# EAGLE board CT_schematic (EAGLE 7.6.0)

Size 100 x 80 mm. Coordinates in mm from the lower left corner, seen from the top.
Outline: 0,0 100,0 100,80 0,80 0,0
Copper layers (1*16): Top 0.035mm / dielectric 1.5mm / Bottom 0.035mm
Design rules "default": minimum track width 10mil, minimum drill 24mil, track to track 8mil, track to pad 8mil, pad to pad 8mil, via to via 8mil, smd to smd 8mil, copper to edge 40mil, drill to drill 8mil, minimum pad ring 10mil, minimum via ring 8mil, stop-mask expansion 4mil, vias tented up to drill 0mil, thermal gap 10mil

## Footprints (pad centres in the part's own frame; a part is rotated, then mirrored left to right if it is on the bottom)
C0603 = smd 0.8 x 0.8: 1 -0.762,0; 2 0.762,0
C0402 = smd 0.5 x 0.5: 1 -0.508,0; 2 0.508,0
C0805 = smd 1.2 x 1.3: 1 -1.016,0; 2 1.016,0
C1210 = smd 1.2 x 2.5: 1 -1.524,0; 2 1.524,0
EXV-9H = smd 3.505 x 1.676: 1 -2.857,0; 2 2.857,0
PJ-037B_PACKAGE = drill 3.7 square: 1 12,0 | drill 3.2 square: 2 6,0
R0603 = smd 0.8 x 0.8: 1 -0.762,0; 2 0.762,0
UFBGA100 = smd 0.28 x 0.28: A1 -2.75,2.75; A2 -2.25,2.75; A3 -1.75,2.75; A4 -1.25,2.75; A5 -0.75,2.75; A6 -0.25,2.75; A7 0.25,2.75; A8 0.75,2.75; A9 1.25,2.75; A10 1.75,2.75; A11 2.25,2.75; A12 2.75,2.75; B1 -2.75,2.25; B2 -2.25,2.25; B3 -1.75,2.25; B4 -1.25,2.25; B5 -0.75,2.25; B6 -0.25,2.25; B7 0.25,2.25; B8 0.75,2.25; B9 1.25,2.25; B10 1.75,2.25; B11 2.25,2.25; B12 2.75,2.25; C1 -2.75,1.75; C2 -2.25,1.75; C3 -1.75,1.75; C4 -1.25,1.75; C5 -0.75,1.75; C8 0.75,1.75; C9 1.25,1.75; C10 1.75,1.75; C11 2.25,1.75; C12 2.75,1.75; D1 -2.75,1.25; D2 -2.25,1.25; D3 -1.75,1.25; D10 1.75,1.25; D11 2.25,1.25; D12 2.75,1.25; E1 -2.75,0.75; E2 -2.25,0.75; E3 -1.75,0.75; E10 1.75,0.75; E11 2.25,0.75; E12 2.75,0.75; F1 -2.75,0.25; F2 -2.25,0.25; F11 2.25,0.25; F12 2.75,0.25; G1 -2.75,-0.25; G2 -2.25,-0.25; G11 2.25,-0.25; G12 2.75,-0.25; H1 -2.75,-0.75; H2 -2.25,-0.75; H3 -1.75,-0.75; H10 1.75,-0.75; H11 2.25,-0.75; H12 2.75,-0.75; J1 -2.75,-1.25; J2 -2.25,-1.25; J3 -1.75,-1.25; J10 1.75,-1.25; J11 2.25,-1.25; J12 2.75,-1.25; K1 -2.75,-1.75; K2 -2.25,-1.75; K3 -1.75,-1.75; K4 -1.25,-1.75; K5 -0.75,-1.75; K8 0.75,-1.75; K9 1.25,-1.75; K10 1.75,-1.75; K11 2.25,-1.75; K12 2.75,-1.75; L1 -2.75,-2.25; L2 -2.25,-2.25; L3 -1.75,-2.25; L4 -1.25,-2.25; L5 -0.75,-2.25; L6 -0.25,-2.25; L7 0.25,-2.25; L8 0.75,-2.25; L9 1.25,-2.25; L10 1.75,-2.25; L11 2.25,-2.25; L12 2.75,-2.25; M1 -2.75,-2.75; M2 -2.25,-2.75; M3 -1.75,-2.75; M4 -1.25,-2.75; M5 -0.75,-2.75; M6 -0.25,-2.75; M7 0.25,-2.75; M8 0.75,-2.75; M9 1.25,-2.75; M10 1.75,-2.75; M11 2.25,-2.75; M12 2.75,-2.75
SOIC-8 = smd 1.6 x 0.6: 1 -2.7,1.905 | smd 1.55 x 0.6: 2 -2.7,0.635; 3 -2.7,-0.635; 4 -2.7,-1.905; 5 2.7,-1.905; 6 2.7,-0.635; 7 2.7,0.635; 8 2.7,1.905
SSOP-28 = smd 1.5 x 0.4: 1 -3.625,4.225; 2 -3.625,3.575; 3 -3.625,2.925; 4 -3.625,2.275; 5 -3.625,1.625; 6 -3.625,0.975; 7 -3.625,0.325; 8 -3.625,-0.325; 9 -3.625,-0.975; 10 -3.625,-1.625; 11 -3.625,-2.275; 12 -3.625,-2.925; 13 -3.625,-3.575; 14 -3.625,-4.225; 15 3.625,-4.225; 16 3.625,-3.575; 17 3.625,-2.925; 18 3.625,-2.275; 19 3.625,-1.625; 20 3.625,-0.975; 21 3.625,-0.325; 22 3.625,0.325; 23 3.625,0.975; 24 3.625,1.625; 25 3.625,2.275; 26 3.625,2.925; 27 3.625,3.575; 28 3.625,4.225
FCI_10118193-0001LF = smd 0.4 x 1.35: 1 -1.3,2.675; 2 -0.65,2.675; 3 0,2.675; 4 0.65,2.675; 5 1.3,2.675 | smd 1.6 x 1.4: 6 -3.2,2.45; 7 3.2,2.45 | smd 1.9 x 1.9: 8 -1.2,0; 9 1.2,0 | hole 0.5: -3.3,0; 3.3,0
SAMTEC_FTSH-105-01-L-DV-K = smd 0.762 x 2.794: 1 -2.54,-2.032; 2 -2.54,2.032; 3 -1.27,-2.032; 4 -1.27,2.032; 5 0,-2.032; 6 0,2.032; 7 1.27,-2.032; 8 1.27,2.032; 9 2.54,-2.032; 10 2.54,2.032
XCVR_SPBTLE-RF = smd 1.6 x 1: 1 -6.75,0.33; 2 -6.75,-0.94; 3 -6.75,-2.21; 4 -6.75,-3.48; 5 -6.75,-4.75; 7 6.75,-4.75; 8 6.75,-3.48; 9 6.75,-2.21; 10 6.75,-0.94; 11 6.75,0.33 | smd 1 x 1.6: 6 -2.75,-5.75
ABLS-12.000MHZ-B4-T = smd 5.6 x 2.8: 1 0,0; 2 9.5,0
ASEK = smd 1.4 x 1: 1 -1.1,-0.8; 2 1.1,-0.8; 3 1.1,0.8; 4 -1.1,0.8
ASFL1 = smd 1.7 x 1.5: 1 -1.27,-1.1; 2 1.27,-1.1; 3 1.27,1.1; 4 -1.27,1.1
WSON-8 = smd 0.3 x 0.6: 1 -0.75,0; 2 0.05,0; 3 0.85,0; 4 1.65,0; 5 1.65,3.8; 6 0.85,3.8; 7 0.05,3.8; 8 -0.75,3.8 | smd 3 x 2.6: PAD 0.45,1.9
SON-6 = smd 0.55 x 0.3: 1 -0.355,0.5 | smd 0.52 x 0.3: 2 -0.37,0; 3 -0.37,-0.5; 4 0.37,-0.5; 5 0.37,0; 6 0.37,0.5
SW_4-1437565-2 = smd 1.4 x 2.1: 1 -2.23,4.55; 2 -2.23,-4.55; 3 2.23,4.55; 4 2.23,-4.55
LGM67K-G1J2-24-Z = smd 0.8 x 1.4: A -2,0; C 0,0
NC7SZ125M5X = smd 1.3 x 0.7: 1 -1.3,0.95; 2 -1.3,0; 3 -1.3,-0.95; 4 1.3,-0.95; 5 1.3,0.95

## Placement (x,y rotation side)
C1  1e-07  [C0603]  -43.18,77.47 0 top  (outside the outline)
C2  1e-07  [C0603]  -46.99,77.47 0 top  (outside the outline)
C3  1e-07  [C0603]  -50.8,77.47 0 top  (outside the outline)
C4  1e-07  [C0603]  -54.61,77.47 0 top  (outside the outline)
C5  1e-07  [C0603]  -58.42,77.47 0 top  (outside the outline)
C6  4.7e-06  [C0603]  -39.37,77.47 0 top  (outside the outline)
C7  1e-07  [C0603]  -62.23,77.47 0 top  (outside the outline)
C8  1e-08  [C0603]  -66.04,77.47 0 top  (outside the outline)
C9  1e-06  [C0603]  -69.85,77.47 0 top  (outside the outline)
C10  1e-08  [C0402]  -45.72,82.55 0 top  (outside the outline)
C11  1e-07  [C0402]  -49.53,82.55 0 top  (outside the outline)
C12  4.7e-06  [C0805]  -59.69,64.77 0 top  (outside the outline)
C13  1e-07  [C0402]  -53.34,82.55 0 top  (outside the outline)
C14  1e-07  [C0402]  -57.15,82.55 0 top  (outside the outline)
C15  1e-07  [C0402]  -60.96,82.55 0 top  (outside the outline)
C16  4.7e-06  [C0805]  -64.77,64.77 0 top  (outside the outline)
C17  1e-07  [C0402]  -64.77,82.55 0 top  (outside the outline)
C18  1e-07  [C0402]  -68.58,82.55 0 top  (outside the outline)
C19  1e-07  [C0402]  -72.39,82.55 0 top  (outside the outline)
C20  1e-06  [C0603]  -73.66,77.47 0 top  (outside the outline)
C21  1e-07  [C0402]  -76.2,82.55 0 top  (outside the outline)
C22  1e-08  [C0402]  -15.24,87.63 0 top  (outside the outline)
C23  1e-08  [C0402]  -19.05,87.63 0 top  (outside the outline)
C24  1e-08  [C0402]  -22.86,87.63 0 top  (outside the outline)
C25  1e-08  [C0402]  -26.67,87.63 0 top  (outside the outline)
C26  1e-05  [C1210]  -29.21,66.04 0 top  (outside the outline)
C27  1e-05  [C1210]  -35.56,66.04 0 top  (outside the outline)
C28  1e-07  [C0402]  -30.48,87.63 0 top  (outside the outline)
C29  0.0001  [EXV-9H]  -38.1,58.42 0 top  (outside the outline)
C30  0.0001  [EXV-9H]  -49.53,58.42 0 top  (outside the outline)
C31  1e-08  [C0402]  -34.29,87.63 0 top  (outside the outline)
C32  1e-08  [C0402]  -38.1,87.63 0 top  (outside the outline)
C33  1e-08  [C0402]  -41.91,87.63 0 top  (outside the outline)
J1  PJ-037B  [PJ-037B_PACKAGE]  -57.15,25.4 0 top  (outside the outline)
R2  1000.0  [R0603]  -77.47,77.47 0 top  (outside the outline)
R4  4700.0  [R0603]  -15.24,82.55 0 top  (outside the outline)
R5  4700.0  [R0603]  -19.05,82.55 0 top  (outside the outline)
R6  10000.0  [R0603]  -25.4,72.39 0 top  (outside the outline)
R7  10000.0  [R0603]  -30.48,72.39 0 top  (outside the outline)
R8  10000.0  [R0603]  -35.56,72.39 0 top  (outside the outline)
R9  10000.0  [R0603]  -40.64,72.39 0 top  (outside the outline)
R10  4700.0  [R0603]  -22.86,82.55 0 top  (outside the outline)
R11  10000.0  [R0603]  -45.72,72.39 0 top  (outside the outline)
R12  10000.0  [R0603]  -50.8,72.39 0 top  (outside the outline)
R13  4700.0  [R0603]  -26.67,82.55 0 top  (outside the outline)
R14  10000.0  [R0603]  -55.88,72.39 0 top  (outside the outline)
R15  10000.0  [R0603]  -60.96,72.39 0 top  (outside the outline)
R16  10000.0  [R0603]  -66.04,72.39 0 top  (outside the outline)
R17  10000.0  [R0603]  -71.12,72.39 0 top  (outside the outline)
R18  10000.0  [R0603]  -76.2,72.39 0 top  (outside the outline)
R19  10000.0  [R0603]  -15.24,77.47 0 top  (outside the outline)
R20  5.0  [R0603]  -30.48,82.55 0 top  (outside the outline)
R21  10000.0  [R0603]  -20.32,77.47 0 top  (outside the outline)
R22  100000.0  [R0603]  -69.85,64.77 0 top  (outside the outline)
R23  47000.0  [R0603]  -25.4,77.47 0 top  (outside the outline)
R24  100000.0  [R0603]  -74.93,64.77 0 top  (outside the outline)
R25  2231.0  [R0603]  -34.29,82.55 0 top  (outside the outline)
R26  1000.0  [R0603]  -38.1,82.55 0 top  (outside the outline)
R27  10000.0  [R0603]  -30.48,77.47 0 top  (outside the outline)
R28  10000.0  [R0603]  -35.56,77.47 0 top  (outside the outline)
R29  9100.0  [R0603]  -41.91,82.55 0 top  (outside the outline)
R30  680000.0  [R0603]  -15.24,72.39 0 top  (outside the outline)
R31  120000.0  [R0603]  -20.32,72.39 0 top  (outside the outline)
U1  STM32L162VCH6  [UFBGA100]  -25.4,39.37 0 top  (outside the outline)
U2  AT25M02-SSHD-T  [SOIC-8]  -40.64,38.1 0 top  (outside the outline)
U3  FT232RL-REEL  [SSOP-28]  -38.1,7.62 0 top  (outside the outline)
U4  10118193-0001LF  [FCI_10118193-0001LF]  -52.07,48.26 0 top  (outside the outline)
U5  FT232RL-REEL  [SSOP-28]  -50.8,7.62 0 top  (outside the outline)
U6  10118193-0001LF  [FCI_10118193-0001LF]  -62.23,48.26 0 top  (outside the outline)
U7  FTSH-105-01-L-DV-K  [SAMTEC_FTSH-105-01-L-DV-K]  -35.56,26.67 0 top  (outside the outline)
U8  SPBTLE-RF  [XCVR_SPBTLE-RF]  -21.59,10.16 0 top  (outside the outline)
U9  ABLS-12.000MHZ-B4-T  [ABLS-12.000MHZ-B4-T]  -71.12,58.42 0 top  (outside the outline)
U10  ASEK-32.768KHz-ECST  [ASEK]  -29.21,58.42 0 top  (outside the outline)
U11  ASFL1-12MHZ-NCS  [ASFL1]  -26.67,49.53 0 top  (outside the outline)
U12  ASFL1-25MHZ-NCS  [ASFL1]  -43.18,49.53 0 top  (outside the outline)
U13  LP3878SDX-ADJ/NOPB  [WSON-8]  -62.23,36.83 0 top  (outside the outline)
U14  TPS3895ADRYR  [SON-6]  -44.45,86.36 0 top  (outside the outline)
U15  4-1437565-2  [SW_4-1437565-2]  -73.66,24.13 0 top  (outside the outline)
U16  Q65110A2395  [LGM67K-G1J2-24-Z]  -17.78,66.04 0 top  (outside the outline)
U17  nc7sz125m5x  [NC7SZ125M5X]  -40.64,64.77 0 top  (outside the outline)
U18  nc7sz125m5x  [NC7SZ125M5X]  -46.99,64.77 0 top  (outside the outline)
U19  nc7sz125m5x  [NC7SZ125M5X]  -53.34,64.77 0 top  (outside the outline)

## Library data of the parts
C1-C33 J1 R2 R4-R31 U1-U19 = circuit_tree

## Nets
CLK_CRYSTAL_U5_27: U5.27 U9.1
CLK_CRYSTAL_U5_28: U5.28 U9.2
CLK_U1_D1: U1.D1 U10.3
CLK_U1_F1: U1.F1 U12.3
CLK_U3_27: U3.27 U11.3
GND: C1.2 C2.2 C3.2 C4.2 C5.2 C6.2 C7.2 C8.2 C9.2 C10.2 C11.2 C12.2 C13.2 C14.2 C15.2 C16.2 C17.2 C18.2 C19.2 C20.2 C21.2 C22.2 C23.2 C24.2 C25.2 C26.2 C27.2 C28.2 C29.2 C30.2 C31.2 C32.2 C33.2 J1.2 R2.2 R6.2 R12.2 R15.2 R19.2 R20.2 R22.2 R23.2 R26.2 R29.2 R31.2 U1.D3 U1.E3 U1.F2 U1.F11 U1.F12 U1.J1 U1.K1 U2.4 U3.7 U3.18 U3.21 U3.25 U3.26 U4.5 U4.6 U4.7 U4.8 U4.9 U5.7 U5.18 U5.21 U5.25 U5.26 U6.5 U6.6 U6.7 U6.8 U6.9 U7.3 U7.5 U8.6 U10.2 U11.2 U12.2 U13.3 U13.PAD U14.2 U16.C U17.2 U17.3 U18.1 U18.3 U19.1 U19.3
NET_U1_A4: R6.1 U1.A4
NET_U1_E2: C7.1 U1.E2
NET_U1_H2: R5.1 U1.H2 U19.4
NET_U1_M11: U16.A
NET_U1_M12: U15.3 U15.4
NET_U2_3: R7.1 U2.3
NET_U2_7: R9.1 U2.7
NET_U3_14: R11.1 U3.14
NET_U3_17: C13.1 U3.17
NET_U3_19: R12.1 U3.19
NET_U4_1: R10.1 U4.1
NET_U4_2: U3.16 U4.2
NET_U4_3: U3.15 U4.3
NET_U4_19: R10.2
NET_U5_14: R14.1 U5.14
NET_U5_17: C17.1 U5.17
NET_U5_19: R15.1 U5.19
NET_U6_1: R13.1 U6.1
NET_U6_2: U5.16 U6.2
NET_U6_3: U5.15 U6.3
NET_U6_19: R13.2
NET_U7_9: R20.1 U7.9
NET_U8_11: R4.1 U8.11 U18.4
NET_U13_1: C25.1 U13.1
NET_U13_6: R25.2 R26.1 U13.6
NET_U13_8: R24.1 U13.8
NET_U14_1: R28.1 R29.1 U14.1
NET_U14_3: R30.2 R31.1 U14.3
NET_U14_4: R27.1 U14.4 U17.4 U18.2 U19.2
NET_U15_1: R2.1 U15.1 U15.2
PROC_GPIO_TO_U8_SPI_IRQ: R23.1 U1.A1 U8.4
PROC_SPI1_MISO: U1.A7 U8.8
PROC_SPI1_MOSI: U1.C5 U8.9
PROC_SPI1_NSS: R21.1 U1.L9 U8.10
PROC_SPI1_SCK: R22.1 U1.K4 U8.7
PROC_SPI2_MISO: U1.B8 U2.2
PROC_SPI2_MOSI: U1.B7 U2.5
PROC_SPI2_NSS: R8.1 U1.C9 U2.1
PROC_SPI2_SCK: U1.B9 U2.6
PROC_SYS_JTCK_SWCLK: R19.1 U1.A10 U7.4
PROC_SYS_JTDI: R17.1 U1.A9 U7.8
PROC_SYS_JTDO_TRACESWO: U1.A8 U7.6
PROC_SYS_JTMS_SWDIO: R18.1 U1.A11 U7.2
PROC_USART1_CTS: U1.B12 U3.3
PROC_USART1_RTS: U1.A12 U3.11
PROC_USART1_RX: U1.B4 U3.1
PROC_USART1_TX: U1.B5 U3.5
PROC_USART2_CTS: U5.3
PROC_USART2_RTS: U5.11
PROC_USART2_RX: U5.1
PROC_USART2_TX: U5.5
RST_OUT_U7_JTAG_RST_B: R16.1 U7.10 U17.1
VCC_S1_15V0: C26.1 C29.1 C30.1 J1.1 R24.2 U13.4
VCC_TIER1_3V3: C1.1 C2.1 C3.1 C4.1 C5.1 C6.1 C8.1 C9.1 C10.1 C11.1 C12.1 C14.1 C15.1 C16.1 C18.1 C19.1 C20.1 C21.1 C22.1 C23.1 C24.1 C27.1 C28.1 C31.1 C32.1 C33.1 R4.2 R5.2 R7.2 R8.2 R9.2 R11.2 R14.2 R16.2 R17.2 R18.2 R21.2 R25.1 R27.2 R28.2 R30.1 U1.C4 U1.G2 U1.G11 U1.G12 U1.H3 U1.L1 U1.M1 U2.8 U3.4 U3.20 U5.4 U5.20 U7.1 U8.5 U10.4 U11.4 U12.4 U13.5 U14.6 U17.5 U18.5 U19.5

## Tracks (layer width: path | path; a pad name or v marks a point on that pad's centre or on a via)
CLK_CRYSTAL_U5_27  (1 unrouted)
CLK_CRYSTAL_U5_28  (1 unrouted)
CLK_U1_D1  (1 unrouted)
CLK_U1_F1  (1 unrouted)
CLK_U3_27  (1 unrouted)
GND  (88 unrouted)
NET_U1_A4  (1 unrouted)
NET_U1_E2  (1 unrouted)
NET_U1_H2  (2 unrouted)
NET_U1_M12  (1 unrouted)
NET_U2_3  (1 unrouted)
NET_U2_7  (1 unrouted)
NET_U3_14  (1 unrouted)
NET_U3_17  (1 unrouted)
NET_U3_19  (1 unrouted)
NET_U4_1  (1 unrouted)
NET_U4_2  (1 unrouted)
NET_U4_3  (1 unrouted)
NET_U5_14  (1 unrouted)
NET_U5_17  (1 unrouted)
NET_U5_19  (1 unrouted)
NET_U6_1  (1 unrouted)
NET_U6_2  (1 unrouted)
NET_U6_3  (1 unrouted)
NET_U7_9  (1 unrouted)
NET_U8_11  (2 unrouted)
NET_U13_1  (1 unrouted)
NET_U13_6  (2 unrouted)
NET_U13_8  (1 unrouted)
NET_U14_1  (2 unrouted)
NET_U14_3  (2 unrouted)
NET_U14_4  (4 unrouted)
NET_U15_1  (2 unrouted)
PROC_GPIO_TO_U8_SPI_IRQ  (2 unrouted)
PROC_SPI1_MISO  (1 unrouted)
PROC_SPI1_MOSI  (1 unrouted)
PROC_SPI1_NSS  (2 unrouted)
PROC_SPI1_SCK  (2 unrouted)
PROC_SPI2_MISO  (1 unrouted)
PROC_SPI2_MOSI  (1 unrouted)
PROC_SPI2_NSS  (2 unrouted)
PROC_SPI2_SCK  (1 unrouted)
PROC_SYS_JTCK_SWCLK  (2 unrouted)
PROC_SYS_JTDI  (2 unrouted)
PROC_SYS_JTDO_TRACESWO  (1 unrouted)
PROC_SYS_JTMS_SWDIO  (2 unrouted)
PROC_USART1_CTS  (1 unrouted)
PROC_USART1_RTS  (1 unrouted)
PROC_USART1_RX  (1 unrouted)
PROC_USART1_TX  (1 unrouted)
RST_OUT_U7_JTAG_RST_B  (2 unrouted)
VCC_S1_15V0  (5 unrouted)
VCC_TIER1_3V3  (62 unrouted)